# Altium PCB PCB1.PcbDoc
Units mil, origin at the board's own origin, x right, y up, seen from the top; angles counter-clockwise.
Board outline 1480 x 2005 mil, 2 copper layers (Top Layer, Bottom Layer); 11 components, 6 nets, 22 pads, 0 vias.
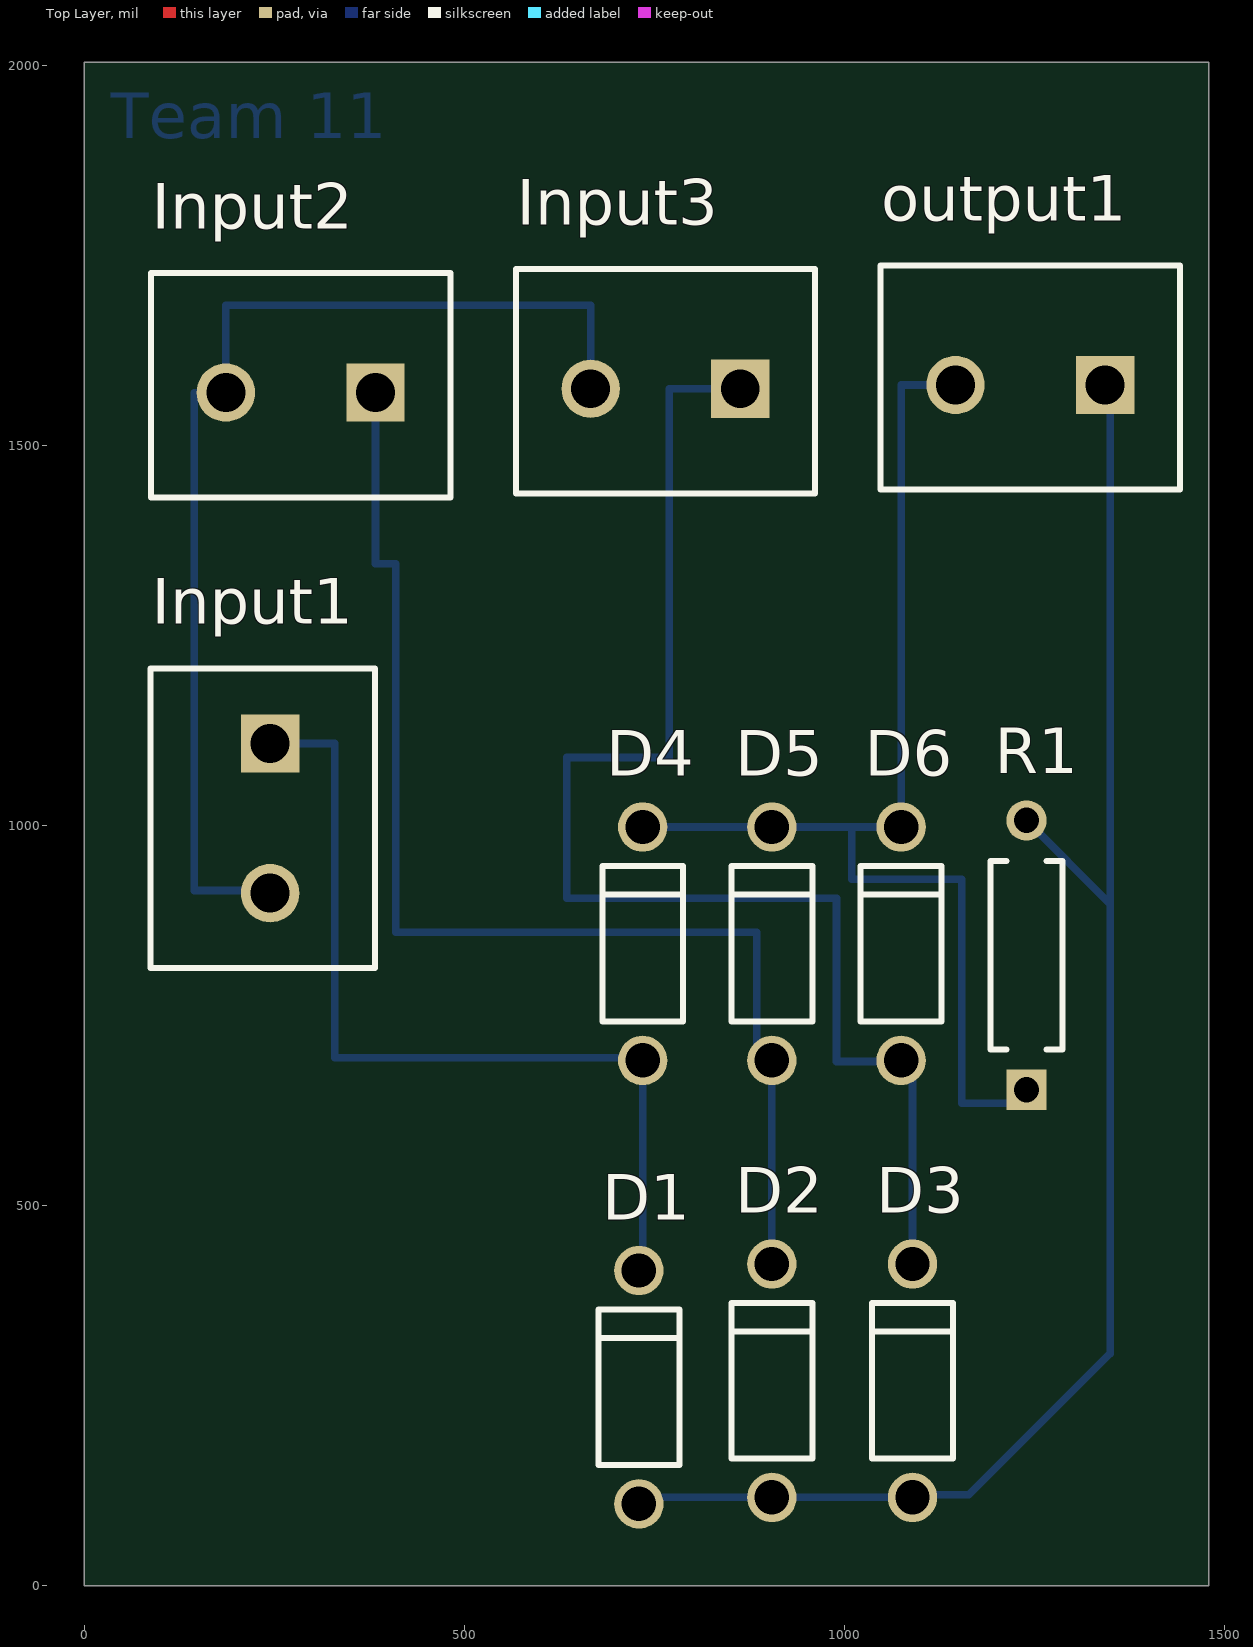
[diagram p0: Top Layer view]
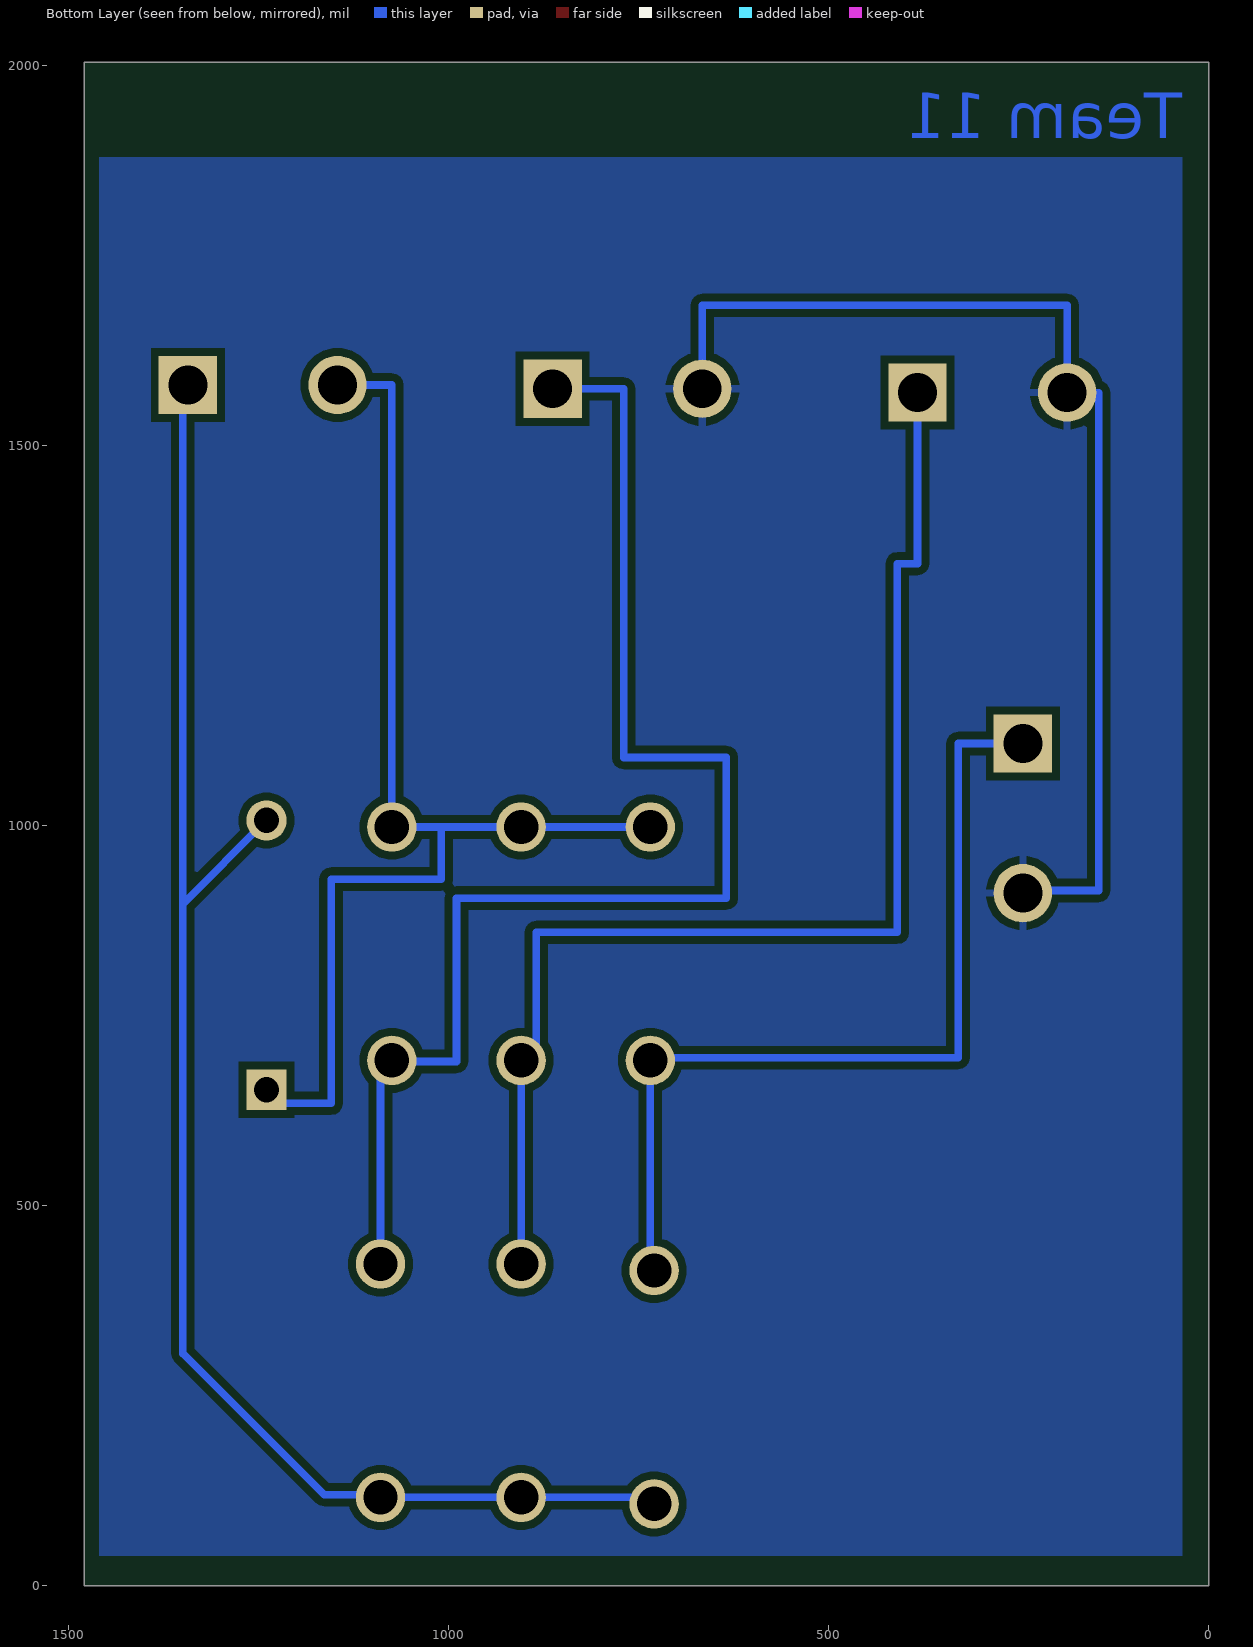
[diagram p1: Bottom Layer view, seen from below]

## Layer stack, top to bottom
Top Solder: solder mask 0.4, Solder Resist, Dk 3.5
Top Layer: signal copper 1.4
Dielectric 1: dielectric 12.6, FR-4, Dk 4.8
Bottom Layer: signal copper 1.4
Bottom Solder: solder mask 0.4, Solder Resist, Dk 3.5

## Board outline
0,0 1480,0 1480,2005 0,2005

## Design rules (kind name [scope] priority, off if disabled: settings)
Clearance [All] p1: gap=10 ignorepadtopadclearanceinfootprint=FALSE except(0: Arc-Hole Track-Hole SMDPad-Hole THPad-Hole Via-Hole Fill-Hole Poly-Hole Region-Hole Text-Hole)
PolygonConnect [All] p1: connectstyle=Relief reliefconductorwidth=10 reliefentries=4 polygonreliefangle="90 Angle" airgapwidth=10
RoutingVias [All] p1: holewidth=28 width=50 viastyle="Through Hole" minholewidth=28 minwidth=50 maxholewidth=28 maxwidth=50
SolderMaskExpansion [All] p1: expansion=4 istentingtop=FALSE
Width [All] p1: maxlimit=10 minlimit=10 preferedwidth=10
30 further rules are at their usual default settings.

## Components (designator, comment, footprint, x,y, rotation, side; value= is the part's Value field where it differs from the comment)
D1 "1N4007" FAIR-DO-41-2 730,261.46 r90 top
D2 "1N4007" FAIR-DO-41-2 905,270 r90 top
D3 "1N4007" FAIR-DO-41-2 1090,270 r90 top
D4 "1N4007" FAIR-DO-41-2 735,845 r90 top
D5 "1N4007" FAIR-DO-41-2 905,845 r90 top
D6 "1N4007" FAIR-DO-41-2 1075,845 r90 top
Input1 "691137710002" terminals 235,1010 r270 top
Input2 "691137710002" terminals 285,1580 r180 top
Input3 "691137710002" terminals 765,1585 r180 top
output1 "691137710002" terminals 1245,1590 r180 top
R1 "MFR-25FBF52-221R" RESA60-630X240 1240,830 r90 top value=330

## Footprints (in the part's own frame and the unit in brackets; to place one, negate y for a bottom-side part, rotate by r counter-clockwise, add the part's x,y. Pads: shape width x height; smd on the part's side, far side on the other; paste and mask are expansions set on the pad)
FAIR-DO-41-2 [mm] "THD, 2-Leads, Body 5.2x2.72mm, Pin Spacing 7.8mm"
  round 1.65 hole 1.15: 1(-3.9,0) 2(3.9,0)
  silkscreen extent -2.6,-1.35 2.6,1.35, body extent -4.29,-1.17 4.29,1.17, height 2.35
RESA60-630X240 [mm] "Axial Resistor, 2-Leads, Dia 2.4mm, Body Length 6.3mm"
  rect 1.35x1.35 hole 0.85: 1(-4.5,0)
  round 1.35 hole 0.85: 2(4.5,0)
  silkscreen extent -3.15,-1.2 3.15,1.2, body extent -4.77,-1.19 4.77,1.2, height 2.4
terminals [mm] "Horizontal Cable Entry with Pressure Clamp, pitch 5mm, 02p"
  rect 1.95x1.95 hole 1.3: 1(-2.5,0.25)
  round 1.95 hole 1.3: 2(2.5,0.25)
  silkscreen extent -5,-3.75 5,3.75, body extent -5,-3.75 5,3.75, height 11.6

## Part data
D1 D2 D3 D4 D5 D6: library part CMP-004-00007-2, "General Purpose Rectifier, 1.1 V, 1.0 A, -55 to 175 degC, 2-Pin DO-41, RoHS, Tape and Reel", Case/Package=DO-41-2, Forward Current=1A, Forward Voltage=1.1V, Manufacturer=Fairchild, Max Operating Temperature=175°C, Max Surge Current=30A, Min Operating Temperature=-55°C, Package Description="2-Pin Axial Lead, Dia 2.375 mm, Body Length 4.63 mm", Package Quantity=5000, Package Version="Rev. 2, 09/2008", Peak Reverse Current=5uA, Datasheet URL=https://www.fairchildsemi.com/datasheets/1N/1N4007.pdf, Datasheet Version="Rev. 1.1.0, 11/2014", Elements=1, Manufacturer URL=https://www.fairchildsemi.com/, Mounting Technology=TH, Package Reference=DO-41-2, Package URL=http://www.fairchildsemi.com/dwg/DO/DO41A.pdf, Packaging=TapeandReel, Pins=2, RoHS Compliant=True
Input1 Input2 Input3 output1: library part terminals, "Series 1377 - 5.00 mm Horizontal Entry with Pressure Clamp WR-TBL, 2 pin", Manufacturer="Wurth Elektronik", Operating Temperature=-30to120degC, Datasheet URL=http://katalog.we-online.de/pbs/datasheet/691137710002.pdf, Manufacturer URL=http://www.we-online.de, Mounting Technology=THT, Package Reference=691137710002, Packaging=Box, Part Number=691137710002, Pin Number=2, Pitch=5.00mm, Publisher=WurthElektronik
R1: library part CMP-009-00051-4, "Axial Resistor, 221 Ohm, +/- 1%, 250 mW, -55 to 155 degC, 2-Pin THD, RoHS, Bulk", Case/Package=Axial, Manufacturer=Yageo, Max Operating Temperature=155°C, Min Operating Temperature=-55°C, Package Description="2-Pin Axial Lead, Dia 2.4 mm, Body Length 6.3 mm", Package Quantity=200, Package Reference=MFR-25, Power=250mW, Tolerance=1%, Voltage Rating=250V, Datasheet URL=http://www.yageo.com/documents/recent/Yageo%20LR_MFR_2013.pdf, Datasheet Version=Apr-13, Manufacturer URL=http://www.yageo.com/, Mounting Technology=TH, Packaging=Bulk, RoHS Compliant=True

## Nets (pads, with @x,y where several pads share a name; then routed paths per layer and width w, separated by ;. In a path a pad name is that pad's centre, name@x,y a point inside that pad or via, vN(x,y) a via of type N, cw(c..) or ccw(c..) an arc to the next point about the centre after c; other vN are vias at no path point)
GND: Input1.2 Input2.2 Input3.2 | length 1504.7
  Bottom Layer w10: Input1.2 244.84,915 145,915 145,1570.16 Input2.2 186.57,1685 666.57,1685 Input3.2
NetD1_1: D1.1 D2.1 D3.1 output1.1 R1.2 | length 2141.7
  Bottom Layer w10: D1.1 730,116.46 D2.1 D3.1 1090,120 1164.14,120 1350,305.86 1350,897.17 ; R1.2 1350,897.17 ; output1.1 1350,1573.58 1350,897.17
NetD1_2: D1.2 D4.1 Input1.1 | length 1188.6
  Bottom Layer w10: Input1.1 330,1108.43 330,695 735,695 D4.1 735,415 D1.2
NetD2_2: D2.2 D5.1 Input2.1 | length 1668.2
  Bottom Layer w10: Input2.1 383.43,1345 410,1345 410,860 885,860 885,691.46 D5.1 D2.2
NetD3_2: D3.2 D6.1 Input3.1 | length 1838
  Bottom Layer w10: Input3.1 770,1575.16 770,1090 635,1090 635,905 990,905 990,690 1075,690 D6.1 1090,691.46 D3.2
NetD4_2: D4.2 D5.2 D6.2 output1.2 R1.1 | length 1604.6
  Bottom Layer w10: D4.2 D5.2 1010,998.54 ; output1.2 1075,1580.16 D6.2 1010,998.54 ; R1.1 1240,635 1155,635 1155,930 1010,930 1010,998.54

## Polygon pours and split planes (outlines as drawn)
GND on Bottom Layer "GND_L02_P000" (solid, pour order 0): 35,1880 1460,1880 1460,40 35,40 35,1885

## Other copper
Bottom Layer:
  text "Team 11" at 35.06,1905 h60